# Altium PCB PCB1.PcbDoc
Units mm, origin at the board's own origin, x right, y up, seen from the top; angles counter-clockwise.
Board outline 28.83 x 22.61 mm, 2 copper layers (Top Layer, Bottom Layer); 35 components, 19 nets, 94 pads, 20 vias.
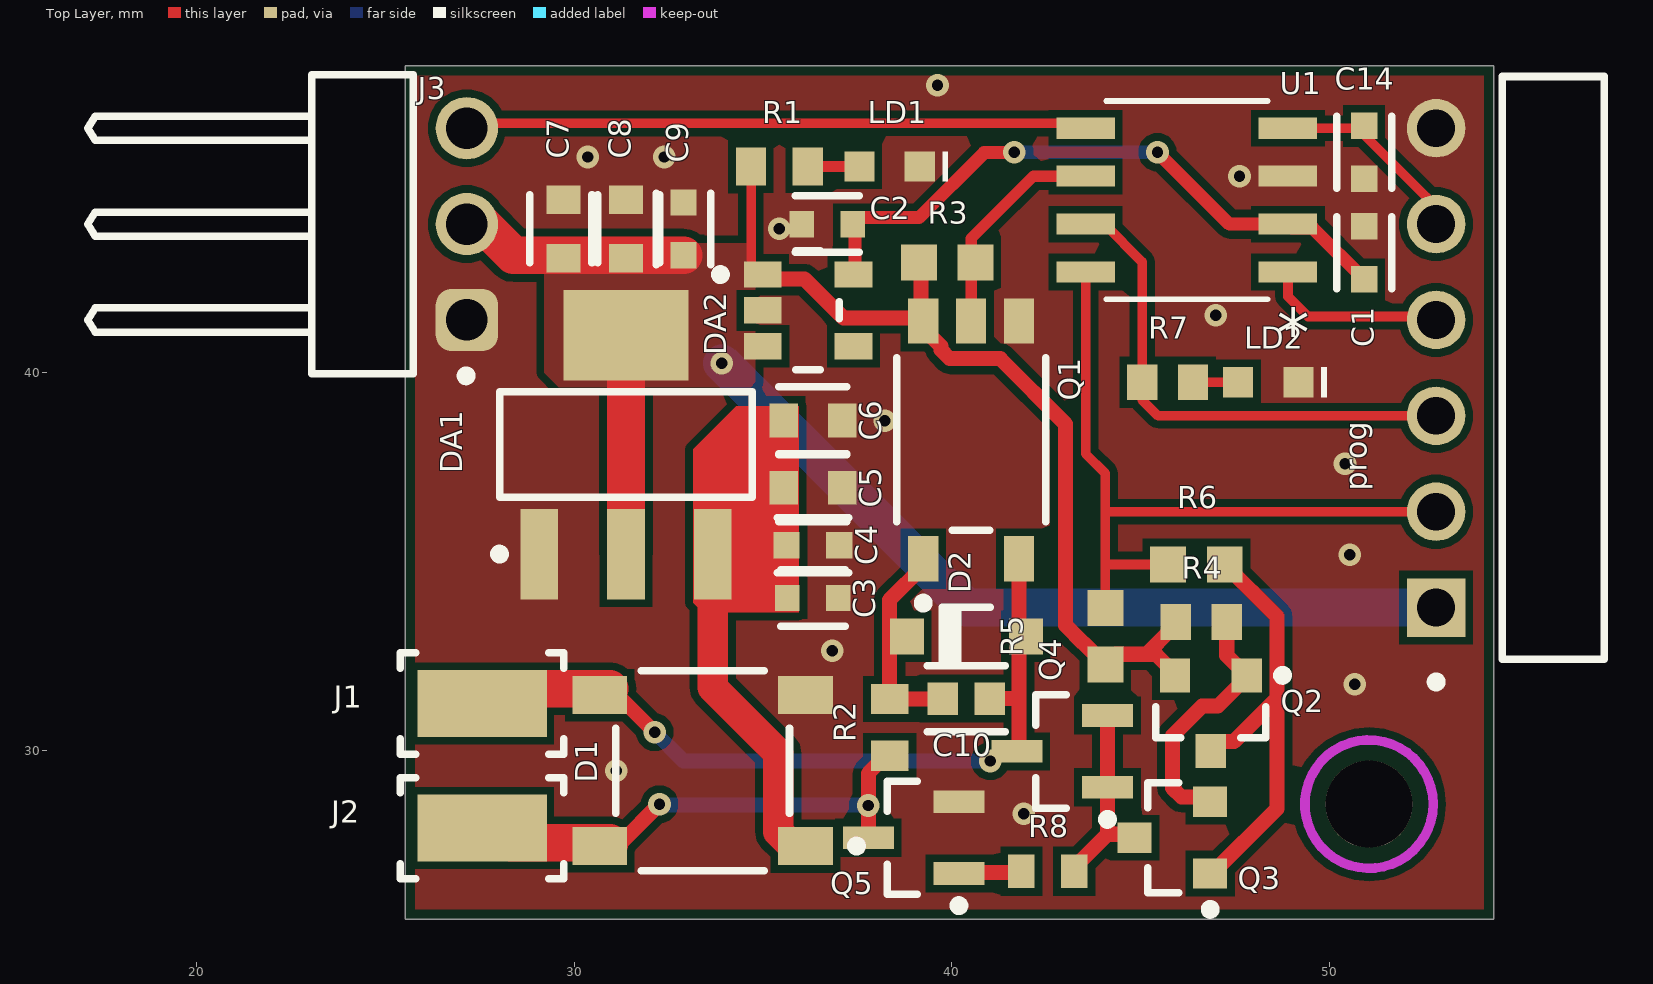
[diagram p0: Top Layer view]
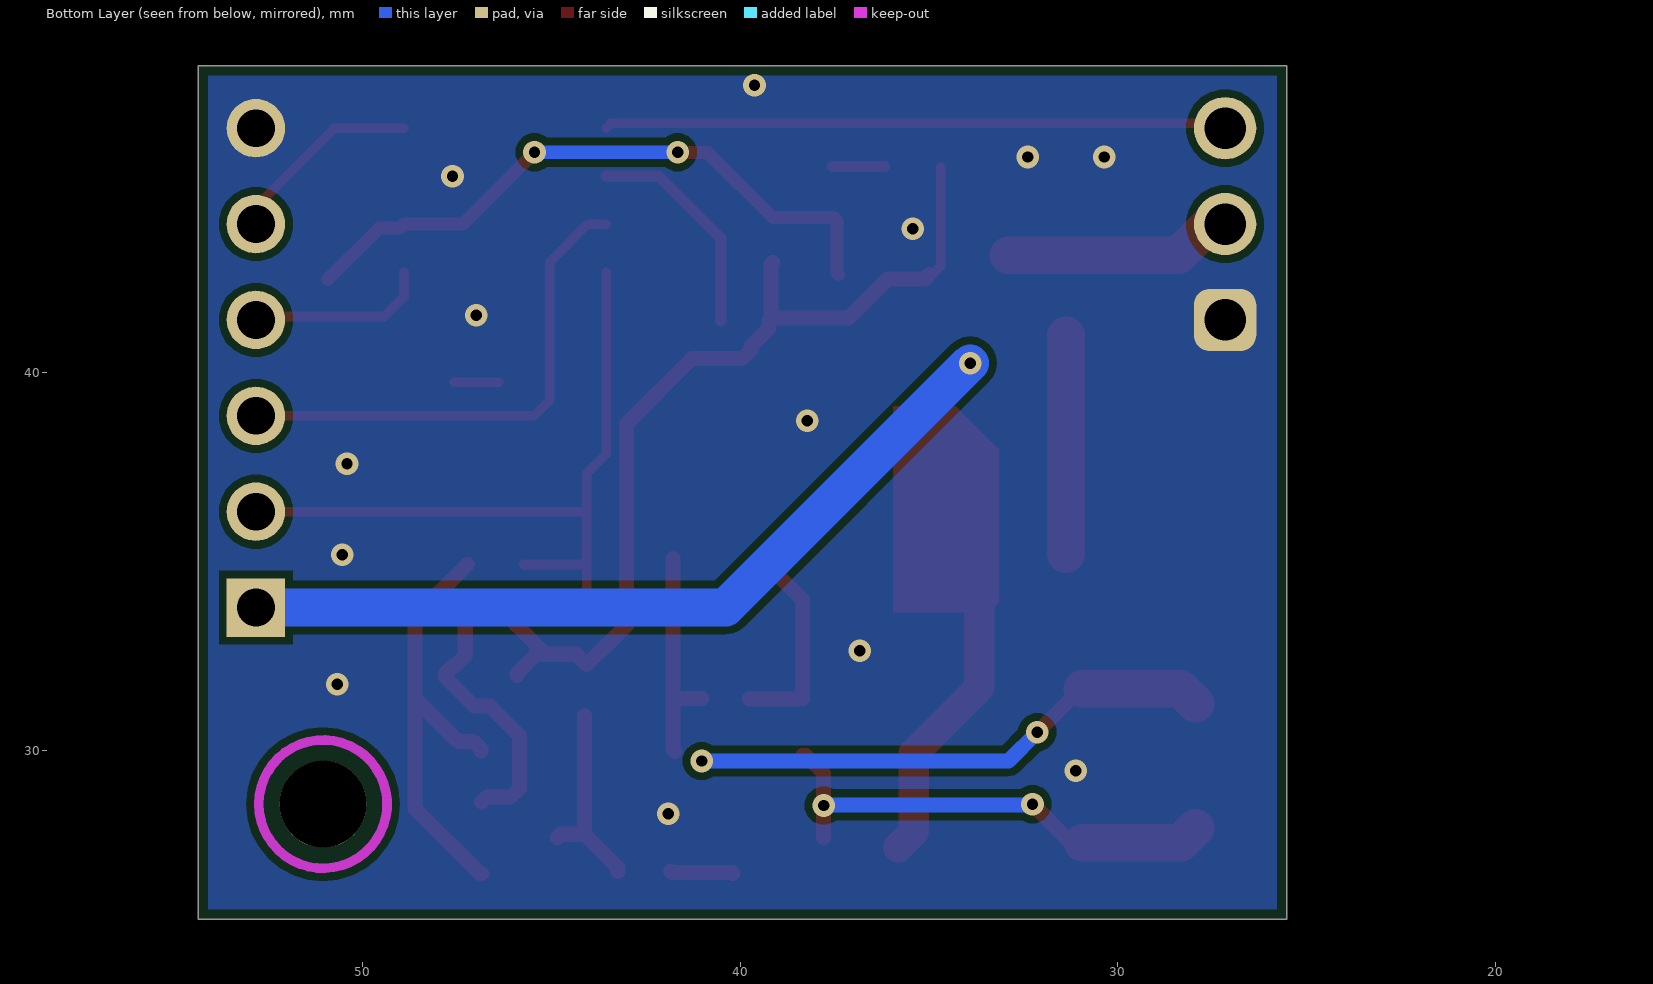
[diagram p1: Bottom Layer view, seen from below]
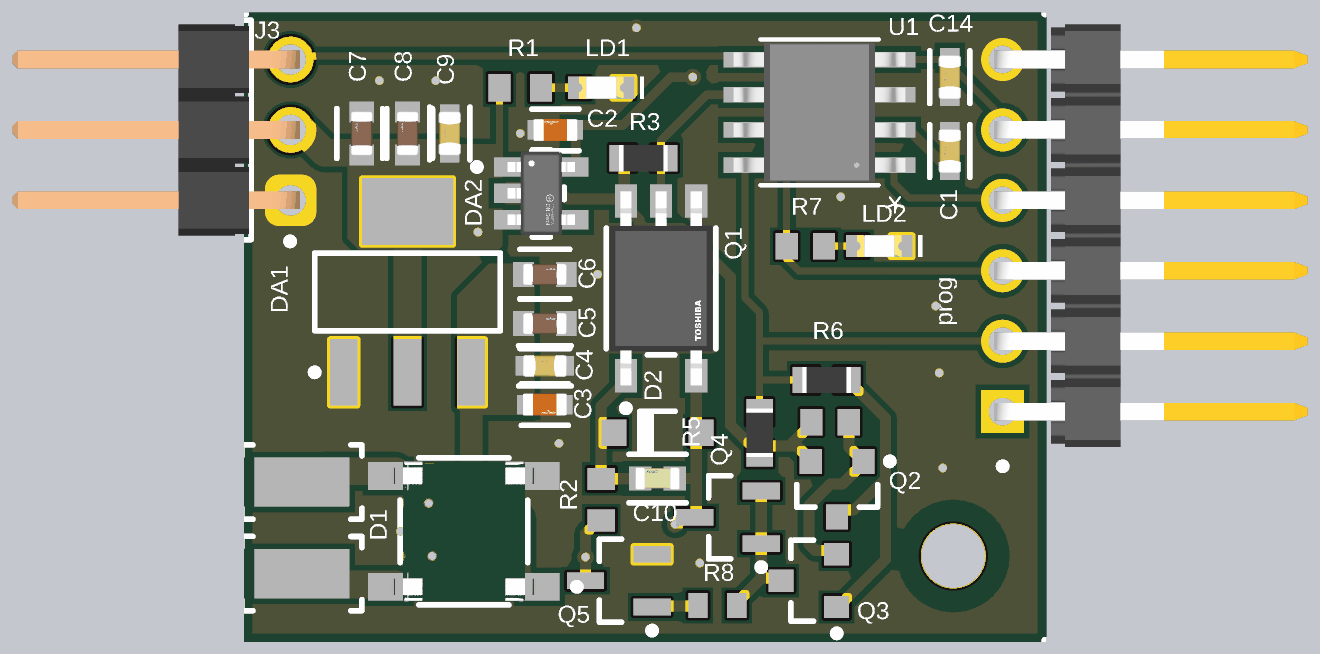
[diagram p2: 3D render of the assembled board from above, using the file's embedded part models]

## Layer stack, top to bottom
Top Solder: solder mask 0.0102, Solder Resist, Dk 3.5
Top Layer: signal copper 0.0356
Dielectric 1: dielectric 0.32, FR-4, Dk 4.8
Bottom Layer: signal copper 0.0356
Bottom Solder: solder mask 0.0102, Solder Resist, Dk 3.5

## Board outline
25.527,25.527 54.356,25.527 54.356,48.133 25.527,48.133

## Design rules (kind name [scope] priority, off if disabled: settings)
BoardOutlineClearance [All] p1: gap=0.254 ignorepadtopadclearanceinfootprint=FALSE except(0: Arc-SplitContinuation Track-SplitContinuation SMDPad-SplitContinuation THPad-SplitContinuation Via-SplitContinuation Fill-SplitContinuation Poly-SplitContinuation Region-SplitContinuation Text-SplitContinuation)
Clearance [All] p1: gap=0.2 ignorepadtopadclearanceinfootprint=FALSE
PolygonConnect [All] p1: connectstyle=Direct reliefconductorwidth=0.254 reliefentries=4 polygonreliefangle="90 Angle" airgapwidth=0.254
RoutingVias [All] p1: holewidth=0.3 width=0.7 viastyle="Through Hole" minholewidth=0.3 minwidth=0.5 maxholewidth=3 maxwidth=5
SolderMaskExpansion [All] p1: expansion=0.102 istentingtop=FALSE
SupplyNets "Schematic Supply Nets_3" [InNet('+12V')] p1: voltage=0.000
SupplyNets "Schematic Supply Nets_2" [InNet('+5V')] p2: voltage=0.000
SupplyNets "Schematic Supply Nets_1" [InNet('GND')] p3: voltage=0.000
SupplyNets "Schematic Supply Nets" [InNet('+3V3')] p4: voltage=0.000
Width [All] p1: maxlimit=1 minlimit=0.254 preferedwidth=0.3
30 further rules are at their usual default settings.

## Components (designator, comment, footprint, x,y, rotation, side; value= is the part's Value field where it differs from the comment)
C1 "CGA3E2X7R1H104K080AA" FP-CGA3E-0_3-0_1-MFG 50.927,43.18 r90 top
C2 "GRM188R60J106ME47D" FP-GRM188-0_1-e0_2_0_55-MFG 36.703,43.942 r180 top
C3 "GRM188R60J106ME47D" FP-GRM188-0_1-e0_2_0_55-MFG 36.322,34.036 r0 top
C4 "CGA3E2X7R1H104K080AA" FP-CGA3E-0_3-0_1-MFG 36.322,35.433 r0 top
C5 "GRM188R61A226ME15D" FP-GRM188-0_2-MFG 36.322,36.957 r0 top
C6 "GRM188R61A226ME15D" FP-GRM188-0_2-MFG 36.322,38.735 r0 top
C7 "GRM188R61A226ME15D" FP-GRM188-0_2-MFG 29.718,43.815 r90 top
C8 "GRM188R61A226ME15D" FP-GRM188-0_2-MFG 31.369,43.815 r90 top
C9 "CGA3E2X7R1H104K080AA" FP-CGA3E-0_3-0_1-MFG 32.893,43.815 r90 top
C10 "C0603C271J5GACTU" FP-C0603C-CF-IPC_C 40.386,31.369 r0 top value="270 pF"
C14 "CGA3E2X7R1H104K080AA" FP-CGA3E-0_3-0_1-MFG 50.927,45.847 r90 top
D1 "ABS10A-13" FP-SOPA-4-MFG 33.401,29.464 r180 top
D2 "1N4148W-7-F" DIOD-SOD123-2_V 40.386,33.02 r180 top
DA1 "LD1117S50CTR" SOT-223_N 31.369,38.1 r90 top
DA2 "NCP114ASN330T1G" FP-483-MFG 36.195,41.656 r0 top
J1 "5015" FP-5015-MFG 27.559,31.242 r0 top
J2 "5015" FP-5015-MFG 27.559,27.94 r0 top
J3 "61300311021" 61300311021 24.384,43.942 r270 top
LD1 "150060VS75000" WL-SMCW_0603_150060xx75000 38.354,45.466 r180 top
LD2 "150060VS75000" WL-SMCW_0603_150060xx75000 48.387,39.751 r180 top
prog "901210766" FP-901210766-MFG 55.832,40.132 r90 top
Q1 "TLP2362(TPR,E" FP-11-4L1S-MFG 40.513,38.227 r90 top
Q2 "BC857CLT1G" ONSC-SOT-23-3-318-08_V 46.863,30.988 r270 top
Q3 "BC857CLT1G" ONSC-SOT-23-3-318-08_V 45.847,27.686 r180 top
Q4 "BC847B" INF-SOT23_M 42.926,29.972 r180 top
Q5 "BC847B" INF-SOT23_M 38.989,27.686 r180 top
R1 "RC0603FR-071K5L" RESC1608X55X25ML10T15 35.433,45.466 r0 top value=1k5
R2 "RC0603FR-071K5L" RESC1608X55X25ML10T15 38.354,30.607 r90 top value=1k5
R3 "ERJ3EKF1002V" RESC1609X55X30NL15T15 39.878,42.926 r0 top value=10k
R4 "ERJ-3EKF1502V" RESC1608X55X30NL15T15 46.609,33.401 r180 top value=15
R5 "ERJ3EKF1002V" RESC1609X55X30NL15T15 44.069,33.02 r90 top value=10k
R6 "ERJ3EKF1002V" RESC1609X55X30NL15T15 46.482,34.925 r0 top value=10k
R7 "ERJ-3EKF1003V" RESC1608X55X30NL15T15 45.72,39.751 r0 top value=100
R8 "RC0603FR-076K8L" RESC1608X55X25NL10T15 42.545,26.797 r180 top value=6k8
U1 "STM32G031J6Mx" SO-8 46.228,44.577 r180 top value=Value

## Footprints (in the part's own frame and the unit in brackets; to place one, negate y for a bottom-side part, rotate by r counter-clockwise, add the part's x,y. Pads: shape width x height; smd on the part's side, far side on the other; paste and mask are expansions set on the pad)
61300311021 [mm] "Pin Header, pitch 2.54 mm, THT, Angled, single row, 3p"
  rrect50% 1.65x1.65 hole 1.1: 1(2.54,2.77)
  round 1.65 hole 1.1: 2(0,2.77) 3(-2.54,2.77)
  silkscreen extent -3.96,-7.27 4.14,2.88, body extent -3.81,-7.27 3.81,3.09, height 2.58
DIOD-SOD123-2_V [mm] "SOD123, 2-Leads, Body 2.7x1.55mm, Height 1.45mm"
  rect 0.9x0.95 smd: 1(-1.575,0) 2(1.575,0)
  silkscreen extent -0.64,-0.83 0.64,0.77, body extent -1.35,-0.77 1.35,0.77, height 1.45
FP-11-4L1S-MFG [mm]
  rect 1.2x0.8 smd paste+0 mask+0: 1(-3.15,1.27) 3(-3.15,-1.27) 4(3.15,-1.27) 5(3.15,0) 6(3.15,1.27)
  silkscreen extent -4.45,-1.97 2.17,1.97, body extent -3.85,-2.07 3.85,2.07, height 0.25
FP-483-MFG [mm]
  rect 1x0.7 smd paste+0 mask+0: 1(-1.2,0.95) 2(-1.2,0) 3(-1.2,-0.95) 4(1.2,-0.95) 5(1.2,0.95)
  silkscreen extent -2.45,-1.58 0.82,1.58, body extent -1.8,-1.83 1.8,1.83, height 0.25
FP-5015-MFG [mm]
  rect 3.43x1.78 smd paste+0 mask+0: 1(0,0)
  silkscreen extent -2.16,-1.34 2.17,1.34
FP-901210766-MFG [mm]
  rect 1.55x1.55 hole 1 paste-2539.97 mask+0: 1(-6.35,3)
  round 1.55 hole 1 paste-2539.97 mask+0: 2(-3.81,3) 3(-1.27,3) 4(1.27,3) 5(3.81,3) 6(6.35,3)
  silkscreen extent -8.44,-1.45 7.72,3.12, body extent -7.82,-8.5 7.82,3.88, height 0.25
FP-C0603C-CF-IPC_C [mm]
  rect 0.807x0.858 smd paste+0 mask+0: 1(-0.626,0) 2(0.626,0)
  silkscreen extent -1.03,-0.87 1.03,0.87, body extent -1.13,-0.58 1.13,0.58, height 0.25
FP-CGA3E-0_3-0_1-MFG [mm]
  rect 0.7x0.7 smd paste+0 mask+0: 1(-0.7,0) 2(0.7,0)
  silkscreen extent -0.95,-0.72 0.95,0.72, body extent -1.15,-0.65 1.15,0.65, height 0.25
FP-GRM188-0_1-e0_2_0_55-MFG [mm]
  rect 0.65x0.7 smd paste+0 mask+0: 1(-0.675,0) 2(0.675,0)
  silkscreen extent -0.85,-0.75 0.85,0.75, body extent -1.1,-0.55 1.1,0.55, height 0.25
FP-GRM188-0_2-MFG [mm]
  rect 0.75x0.9 smd paste+0 mask+0: 1(-0.775,0) 2(0.775,0)
  silkscreen extent -0.9,-0.9 0.9,0.9, body extent -1.25,-0.6 1.25,0.6, height 0.25
FP-SOPA-4-MFG [mm]
  rect 1.45x1 smd paste+0 mask+0: 1(-2.725,2) 2(2.725,2) 3(-2.725,-2) 4(2.725,-2)
  silkscreen extent -4.2,-2.65 2.3,2.65, body extent -3.55,-2.75 3.55,2.75, height 0.25
INF-SOT23_M [mm] "SOT23, 3-Leads, Body 2.9x1.3 mm, Pitch 0.95 mm, IPC Low Density"
  rect 1.35x0.6 smd: 1(-1.2,0.95) 2(-1.2,-0.95) 3(1.2,0)
  silkscreen extent -1.33,-1.5 0.7,1.92, body extent -0.7,-1.5 0.7,1.5, height 1.1
ONSC-SOT-23-3-318-08_V [mm] "SOT23, 3-Leads, Body 2.92x1.3mm, Pitch 0.95mm"
  rect 0.9x0.8 smd: 1(-1,0.95) 2(-1,-0.95) 3(1,0)
  silkscreen extent -1.12,-1.46 0.65,2.03, body extent -0.65,-1.46 0.65,1.46, height 1.11
RESC1608X55X25ML10T15 [mm] "Chip Resistor, 2-Leads, Body 1.60x0.80mm, IPC Low Density"
  rect 0.8x1 smd: 1(-0.75,0) 2(0.75,0)
  body extent -0.85,-0.45 0.85,0.45, height 0.55
RESC1608X55X25NL10T15 [mm] "Chip Resistor, 2-Leads, Body 1.70x0.90mm, IPC Medium Density"
  rect 0.7x0.9 smd: 1(-0.7,0) 2(0.7,0)
  body extent -0.85,-0.45 0.85,0.45, height 0.55
RESC1608X55X30NL15T15 [mm] "Chip Resistor, 2-Leads, Body 1.60x0.80mm, IPC Medium Density"
  rect 0.8x0.95 smd: 1(-0.675,0) 2(0.675,0)
  body extent -0.87,-0.48 0.87,0.48, height 0.55
RESC1609X55X30NL15T15 [mm] "Chip Resistor, 2-Leads, Body 1.75x0.95mm, IPC Medium Density"
  rect 0.95x0.95 smd: 1(-0.75,0) 2(0.75,0)
  body extent -0.87,-0.48 0.87,0.48, height 0.55
SO-8 [mil] "STM32 package, SO8N, 4.9 x 6mm"
  rect 61x22 smd paste+0 mask+0: 1(-105.5,75) 2(-105.5,25) 3(-105.5,-25) 4(-105.5,-75) 5(105.5,-75) 6(105.5,-25) 7(105.5,25) 8(105.5,75)
  silkscreen extent -84,-104 84,104, body extent -122,-98 122,99, height 69
SOT-223_N [mm] "SOT223, 4-Leads, Body 6.5x3.5mm, Pitch 2.3mm, Lead Span 7mm, IPC Medium Density"
  rect 2.4x1 smd: 1(-2.9,2.3) 2(-2.9,0) 3(-2.9,-2.3)
  rect 2.4x3.3 smd: 4(2.9,0)
  silkscreen extent -3.02,-3.35 1.4,3.47, body extent -1.85,-3.35 1.85,3.35, height 1.8
WL-SMCW_0603_150060xx75000 [mm] "SMD Mono-color Chip LED, body 1.60 x 0.80 mm"
  rect 0.8x0.8 smd: 1(-0.8,0) 2(0.8,0)
  silkscreen extent -1.55,-0.4 -1.4,0.4, body extent -0.8,-0.4 0.8,0.4, height 0.7

## Part data
C1 C4 C9 C14: library part CMP-2000-07546-2, "Cap Ceramic 100nF 50V X7R 10% Pad SMD 0603 +125°C Automotive T/R", Capacitance=100nF, Case Code (Imperial)=0603, Case Code (Metric)=1608, Dielectric=X7R, Max Operating Temperature=125°C, Min Operating Temperature=-55°C, Package Quantity=1, Ratings=AEC-Q200, Tolerance=10%, Voltage=50V, Case/Package=0603, Composition=Ceramic, Depth=0.8mm, Height=0.8mm, Lead Free="Lead Free", Length=1.6mm, Mount="Surface Mount", Packaging="Tape and Reel", Radiation Hardening=No, REACH SVHC="No SVHC", Termination=SMD/SMT, Thickness=0.035inch, Voltage Rating=50V, Voltage Rating (DC)=50V, Weight=7.1E-05oz, Width=0.8mm
C2 C3: library part CMP-2006-02792-2, "Chip Multilayer Ceramic Capacitors for General Purpose, 0603, 10uF, X5R, 15%, 20%, 6.3V", Capacitance=10uF, Case Code (Imperial)=0603, Case Code (Metric)=1608, Dielectric=X5R, Max Operating Temperature=85°C, Min Operating Temperature=-55°C, Package Quantity=4000, Tolerance=20%, Voltage=6.3V, Case/Package=0603, Depth=0.8mm, Height=0.8mm, Lead Free="Lead Free", Length=1.6mm, Material=Ceramic, Mount="Surface Mount", Packaging="Tape and Reel", Radiation Hardening=No, REACH SVHC="No SVHC", Termination=SMD/SMT, Thickness=0.035inch, Voltage Rating=6.3V, Voltage Rating (DC)=6.3V, Width=0.031inch
C5 C6 C7 C8: library part CMP-2000-06337-3, "Chip Multilayer Ceramic Capacitors for General Purpose, 0603, 22uF, X5R, 15%, 20%, 10V", Capacitance=22uF, Case Code (Imperial)=0603, Case Code (Metric)=1608, Dielectric=X5R, Max Operating Temperature=85°C, Min Operating Temperature=-55°C, Package Quantity=4000, Tolerance=20%, Voltage Rating=10V, Case/Package=0603, Depth=0.8mm, Height=0.8mm, Lead Free="Lead Free", Length=1.6mm, Material=Ceramic, Mount="Surface Mount", Packaging="Tape and Reel", REACH SVHC="No SVHC", Termination=SMD/SMT, Thickness=0.039inch, Voltage Rating (DC)=10V, Weight=0.000222oz, Width=0.8mm
C10: library part CMP-2006-03310-2, "CAP CER 270PF 50V C0G/NP0 0603", Capacitance="270 pF", Manufacturer=KEMET, Package=C0603C-CF, Temperature="-55°C to +125°C", Temperature Characteristic=C0G, Temperature Coefficient=30ppm/°C, Temperature Range High=+125°C, Temperature Range Low=-55°C, Tolerance=0.05, Voltage Rating="50 V", Automotive=Yes, Automotive Grade="Grade 1", Category=Cap, ComponentLink2Description=Datasheet, ComponentLink2URL=https://api.kemet.com/component-edge/download/datasheet/C0603C100J5GACAUTO.pdf, Device Class L1="Passive Components", Device Class L2=Capacitors, Device Class L3="Ceramic Capacitors", Digikey Description="CAP CER 270PF 50V C0G/NP0 0603", Height=0.87mm, Lead Free=Yes, Manufacturer Part Number=C0603C271J5GACTU, Material=Ceramic, Mouser Description="Multilayer Ceramic Capacitors MLCC - SMD/SMT 50volts 270pF C0G 5%", Octopart=https://octopart.com/c0603c271j5gactu-kemet-136709, RoHS=TRUE
D1: library part CMP-12791-000054-1, "BRIDGE RECT 1PHASE 1KV 1A 4SOPA", Average Rectified Current=1A, Case/Package=SMD/SMT, Max Operating Temperature=150°C, Min Operating Temperature=-55°C, Mount="Surface Mount", Packaging="Cut Tape"
D2: library part CMP-2000-04932-2, "Fast Switching Diode, 100 V, 0.15 A, -65 to 150 degC, 2-Pin?SOD123, RoHS, Tape and Reel", If - Forward Current=0.15A, Ir - Reverse Current=1uA, Manufacturer=DiodesIncorporated, Max Surge Current=2A, Maximum Operating Temperature=+150C, Minimum Operating Temperature=-65C, Operating Temperature Range=-65Cto+150C, Package / Case=SOD-123, Package Reference=SOD123-2, Peak Reverse Voltage=100V, Vf - Forward Voltage=1.25V, Brand=DiodesIncorporated, Configuration=Single, Datasheet URL=http://www.farnell.com/datasheets/1915529.pdf, Datasheet Version="Rev. 24-2, 10/2013", Factory Pack Quantity=3000, Height=1.25mm, Length=2.85mm, Manufacturer URL=http://www.diodes.com/, Mounting Style=SMD/SMT, Package URL=http://www.diodes.com/datasheets/ds18004.pdf, Packaging=Reel, Product=SwitchingDiodes, Product Category=Diodes-GeneralPurpose,Power,Switching, Recovery Time=4ns, RoHS=True, Series=1N4148, Type=SwitchingDiode, Unit Weight=0.000353oz, Width=1.7mm
DA1: library part CMP-0244-00311-1, "Fixed Low Drop Positive Voltage Regulator, 5V, 4-Pin SOT-223, Tape and Reel", ComponentLink1Description="Manufacturer URL", ComponentLink1URL=http://www.st.com, ComponentLink2Description=Datasheet, ComponentLink2URL=http://www.st.com/internet/com/TECHNICAL_RESOURCES/TECHNICAL_LITERATURE/DATASHEET/CD00000544.pdf, DatasheetVersion=1/11/2011, PackageDescription="4-Pin SOT-223 Package, 6.5 x 3.5 mm Body, 2.3 mm Pitch, 7 mm Lead Span", PackageReference=SOT-223, PackageVersion=2010
DA2: library part CMP-07128-000001-1, "IC REG LINEAR 3.3V 300MA 5TSOP", Dropout Voltage=150mV, Manufacturer="ON Semiconductor", Max Junction Temp=+150°C, Max Supply Voltage=5.5V, Min Supply Voltage=1.7V, Nominal Supply Current=50uA, Output Current=300mA, Output Voltage=3.3V, Package=483, Temperature="to +150°C", Accuracy Percentage=1%, Automotive=No, Category=IC, ComponentLink2Description=Datasheet, ComponentLink2URL=https://www.onsemi.com/pub/Collateral/NCP114-D.PDF, Device Class L1="Integrated Circuits (ICs)", Device Class L2="Power Management ICs", Device Class L3="Voltage Regulators - Linear", Digikey Description="IC REG LINEAR 3.3V 300MA 5TSOP", Footprint Url=https://www.onsemi.com/pub/Collateral/483.PDF, Height=1.1mm, Lead Free=Yes, Manufacturer Part Number=NCP114ASN330T1G, Number of Outputs=1, Octopart=https://octopart.com/ncp114asn330t1g-on+semiconductor-74628742, Output Type=Fixed, RoHS=TRUE, Standoff Height=0.01mm, Temperature Range High=+150°C
J1 J2: library part CMP-2000-05183-2, "PC TEST POINT MINIATURE", Manufacturer=keystone, Automotive=No, Category=Conn, ComponentLink2Description=Datasheet, ComponentLink2URL=http://www.keyelco.com/product-pdf.cfm?p=1353, Conn Orientation=Straight, Contact Material=Silver, Device Class L1=Connectors, Device Class L2=unset, Device Class L3=unset, Digikey Description="PC TEST POINT MINIATURE", Height=1.65mm, Lead Free=Yes, Manufacturer Part Number=5015, Number of Contacts=1, Octopart=https://octopart.com/5015-keystone-3822, Package=5015, RoHS=TRUE
J3: library part CMP-1502-01061-3, Color=Black, Contact Resistance=20mΩ, Current Rating=3A, Operating Supply Voltage=250V, Connector Type="Male Pin", Contact Material=Copper, Contact Mating Length=5.9944mm, Contact Plating=Gold, Gender=Male, Lead Pitch=2.54mm, Mount="Through Hole", NexarPartId=32855520, Number of Contacts=3, Number of Pins=3, Number of Positions=3, Number of Rows=1, Packaging=Bulk, Pitch=2.54mm, REACH SVHC=Unknown, RoHS=Compliant, Termination=Solder
LD1 LD2: library part CMP-1426-00006-7, "WURTH ELEKTRONIK - 150060VS75000 - LED, Green, SMD, 0603, 30 mA, 2 V, 570 nm", Case Code (Imperial)=0603, Case Code (Metric)=1608, Color=Green, Forward Current=100mA, Forward Voltage=2V, Max Junction Temperature (Tj)=95°C, Max Operating Temperature=85°C, Max Reverse Voltage (DC)=5V, Min Operating Temperature=-40°C, Power Dissipation=72mW, Test Current=20mA, Case/Package=0603, Dominant Wavelength=570nm, Height=700µm, Length=1.6mm, Lens Style="Clear, Rectangular", Luminous Intensity=40mcd, Mount="Surface Mount", Number of Pins=2, Packaging="Tape and Reel", Peak Wavelength=572nm, REACH SVHC=Unknown, Reverse Voltage=5V, RoHS=Compliant, Viewing Angle=140°, Wavelength=570nm, Width=800µm
prog: library part CMP-04776-000096-1, "CONN HEADER R/A 6POS 2.54MM", Current Rating=3A, Manufacturer=Molex, Package=0, Temperature="-55°C to +125°C", Temperature Range High=+125°C, Temperature Range Low=-55°C, Voltage Rating=350V, Automotive=No, Category=Conn, ComponentLink2Description=Datasheet, ComponentLink2URL=https://www.molex.com/webdocs/datasheets/pdf/en-us/0901210766_PCB_HEADERS.pdf, Conn Gender=Male, Conn Orientation="Right Angle", Contact Material=Gold,Nickel, Device Class L1=Connectors, Device Class L2="Headers and Wire Housings", Device Class L3=unset, Digikey Description="CONN HEADER R/A 6POS 2.54MM", Footprint Url=https://www.molex.com/pdm_docs/sd/901210766_sd.pdf, Height=3.6mm, Lead Free=Yes, Manufacturer Part Number=901210766, Number of Contacts=6, Number of Rows=1, Octopart=https://octopart.com/90121-0766-molex-655456, Pitch=2.54mm, RoHS=TRUE
Q1: library part CMP-35887-000013-1, "OPTOISO 3.75KV OPEN COLL SO6-5", Forward Voltage=1.55V, Max Operating Temperature=125°C, Min Operating Temperature=-40°C, Output Current per Channel=25mA, Package Quantity=3000, Input Type=DC, Mount="Surface Mount", Number Of Channels=1, Packaging="Tape and Reel", Propagation Delay=100ns, Series=-
Q2 Q3: library part CMP-1048-00802-1, "General Purpose Transistor, PNP Silicon, 3-Pin SOT-23, Pb-Free, Tape and Reel", Manufacturer="On Semiconductor", ComponentLink1Description="Manufacturer URL", ComponentLink1URL=http://www.onsemi.com/, ComponentLink2Description=Datasheet, ComponentLink2URL=http://www.onsemi.cn/pub_link/Collateral/BC856ALT1-D.PDF, ComponentLink3Description="Package Specification", ComponentLink3URL=http://www.onsemi.cn/pub_link/Collateral/318-08.PDF, DatasheetVersion="Rev. 13", fT Min (MHz)=100, IC Continuous (A)=-0.1, Mounting Technology="Surface Mount", PackageDescription="3-Pin Small Outline Transistor, Body 2.92 x 1.3 mm, Pitch 0.95 mm", PackageReference=SOT-23-3-318-08, PackageVersion="Rev. AP, 11/2009", Packing="Tape and Reel", PartNumber=BC857CLT1G, Polarity=PNP, RoHS=TRUE
Q4 Q5: library part CMP-1177-00042-1, "NPN Silicon AF Transistor, 45 V VCEO, 100 mA IC, SOT23, Reel, Green", Manufacturer=Infineon, ComponentLink1Description="Manufacturer URL", ComponentLink1URL=http://www.infineon.com/, ComponentLink2Description=Datasheet, ComponentLink2URL=http://www.infineon.com/dgdl/bc847series_bc848series_bc849series_bc850series.pdf?folderId=db3a304314dca389011541d30fa21656&fileId=db3a304314dca389011541d4630a1657, ComponentLink3Description="Package Specification", ComponentLink3URL=http://www.infineon.com/dgdl/SOT23-Package_Overview.pdf?folderId=db3a30431936bc4b0119532290053c66&fileId=db3a30431936bc4b0119533468123c85, fT (typ)="250Â MHz", Green=TRUE, IBM (max)="200Â mA", IC (max)="100Â mA", ICBO (max)="15Â nA", ICM (max)="200Â mA", Mounting Technology="Surface Mount", PackageDescription="3-Pin Small Outline Transistor Package, 1.3 x 2.9 mm Body, 0.95 mm Pitch", PackageReference=SOT23, PackageVersion=Apr-08, Packing=Reel, PartNumber=BC847B, Polarity=NPN, Ptot (max)="330Â mW", VCBO (max)="50Â V", VCEO (max)="45Â V", VEBO (max)="6Â V"
R1 R2: library part CMP-2100-03665-1, "Chip Resistor, 1.5 KOhm, +/- 1%, 0.1 W, -55 to 155 degC, 0603 (1608 Metric), RoHS, Tape and Reel", Case Code (Imperial)=0603, Case Code (Metric)=1608, Manufacturer=Yageo, Max Operating Temperature=155degC, Max Power Dissipation=100mW, Min Operating Temperature=-55degC, Package Description="2-Pin Surface Mount Device, Body 1.6 x 0.8 mm", Package Quantity=1, Resistance=1.5KOhm, Temperature Coefficient=100ppm/degreesC, Tolerance=1%, Voltage Rating=50V, Case/Package=0603, Composition=ThickFilm, Datasheet URL=http://www.yageo.com/NewPortal/yageodocoutput?fileName=/pdf/R-Chip/PYu-RC_Group_51_RoHS_L_5.pdf, Datasheet Version="Rev. 5, 10/2016", Depth=0.8mm, Height=0.022inch, Lead Free=LeadFree, Length=0.063inch, Manufacturer URL=http://www.yageo.com/, Military Standard=Not, Number of Pins=2, Number of Terminations=2, Package Reference=0603, Packaging=TapeandReel, Power Rating=100mW, REACH SVHC=NoSVHC, RoHSCompliant=true, Termination=SMD/SMT, Voltage Rating (DC)=50V, Width=0.031inch
R3 R5 R6: library part CMP-1012-00623-3, "Chip Resistor, 10 KOhm, +/- 1%, 0.1 W, -55 to 155 degC, 0603 (1608 Metric), RoHS, Tape and Reel", Case Code (Imperial)=0603, Case Code (Metric)=1608, Manufacturer=Panasonic, Max Operating Temperature=155degC, Max Power Dissipation=100mW, Min Operating Temperature=-55degC, Package Description="2-Pin Surface Mount Device, Body 1.6 x 0.85 mm", Package Quantity=1, Package Reference=603, Resistance=10KOhm, Temperature Coefficient=100ppm\/degreesC, Tolerance=1%, Voltage Rating=75V, Case\/Package=0603, Composition=ThickFilm, Contact Plating=Tin, Datasheet URL=https://industrial.panasonic.com/cdbs/www-data/pdf/RDA0000/AOA0000C304.pdf, Datasheet Version=02/2017, Depth=0.8mm, Height=0.45mm, Lead Free=LeadFree, Length=1.6mm, Manufacturer URL=http://www.panasonic.com/, Military Standard=Not, Mount=SurfaceMount, Mounting Technology=SurfaceMount, Number of Pins=2, Number of Terminations=2, Packaging=TapeandReel, Power Rating=100mW, Radiation Hardening=No, REACH SVHC=NoSVHC, RoHSCompliant=true, Termination=SMD/SMT, Voltage Rating (DC)=75V, Width=0.031inch
R4: library part CMP-2000-00258-1, Manufacturer=Panasonic, Part Number=ERJ-3EKF1502V
R7: library part CMP-2000-00182-1, Manufacturer=Panasonic, Part Number=ERJ-3EKF1003V
R8: library part CMP-1659-00046-1, "Chip Resistor, 6.8 KOhm, +/- 1%, 100 mW, -55 to 155 degC, 0603 (1608 Metric), RoHS, Tape and Reel", Case\Package=Metal, Colour=Black, Current Rating="2 A", Max Operating Temperature="85 degC", Min Operating Temperature="-25 degC", Package Quantity=1, Voltage Rating="34 V", ComponentLink1Description="Manufacturer URL", ComponentLink1URL=http://www.yageo.com/, ComponentLink2Description=Datasheet, ComponentLink2URL=http://www.yageo.com/documents/recent/PYu-RC_Group_51_RoHS_L_04.pdf, Contact Material=Copper, Contact Plating=Silver, DatasheetVersion="Rev. 4, 02/2016", Gender=Female, Height="13 mm", Length="19.5 mm", Mount="Through Hole", PackageDescription="2-Pin Surface Mount Device, Body 1.6 x 0.8 mm", PackageReference=0603, Pins=1, REACH SVHC=Unknown, RoHSCompliant=true, Shielding=Unshielded, Width="10 mm"
U1: "The STM32G031x4/x6/x8 mainstream microcontrollers are based on high-performance Arm® Cortex®-M0+ 32-bit RISC core operating at up to 64 MHz frequency.   / 32 Kbytes of Flash program memory and 8 Kbytes of SRAM. With 28pin UFQFPN 4x4x0.55 package", Manufacturer_Part_Number=stm32g0_so8_t1, Copyright="Copyright (C) 2018 Accelerated Designs. All rights reserved", RefDes=RefDes, Type=DEV, Vendor=STMicroelectronics

## Free pads (board coordinates)
  round 2.3 hole 2.3: 1(51.054,28.575)

## Via types
v1: diameter 0.6, hole 0.3, Top Layer to Bottom Layer, tented both sides, 20 vias

## Nets (pads, with @x,y where several pads share a name; then routed paths per layer and width w, separated by ;. In a path a pad name is that pad's centre, name@x,y a point inside that pad or via, vN(x,y) a via of type N, cw(c..) or ccw(c..) an arc to the next point about the centre after c; other vN are vias at no path point)
+3V3: C1.1 C2.1 DA2.5 U1.2 | length 17.1
  Top Layer w0.35: DA2.5 37.434,42.645 37.434,44.023 37.528,44.117 39.135,44.117 40.856,45.838 41.647,45.838 v1(41.656,45.847) ; v1(45.45,45.847) 47.355,43.942 U1.2 49.012,43.838 49.569,43.838 C1.1
  Bottom Layer w0.35: v1(41.656,45.847) v1(45.45,45.847)
+5V: C7.1 C8.1 C9.1 DA1.2 DA1.4 DA2.1 DA2.3 J3.2 prog.1 Q1.6 Q2.2 R1.1 R3.1 R4.2 R5.1 | length 57.9
  Top Layer w0.254: R1.1 34.683,42.829 34.906,42.606 DA2.1
  Top Layer w0.4: DA2.1 35.111,42.49 36.095,42.49 37.129,41.456 39.164,41.456 Q1.6@39.185,41.434 ; R3.1 39.185,42.868 Q1.6@39.185,41.434 ; Q2.2 45.913,32.038 45.406,32.545 45.153,32.545 ; R4.2 45.934,33.326 45.446,32.838 45.153,32.545 ; Q1.6@39.185,41.434 Q1.6 39.243,41.177 39.713,40.707 39.713,40.611 39.947,40.377 41.284,40.377 43.011,38.65 43.011,33.312 43.477,32.846 43.493,32.846 R5.1 44.344,32.545 45.153,32.545
  Top Layer w1: J3.2@27.432,44.069 28.386,43.115 31.369,43.115 C9.1 ; DA1.2 DA1.4
  Bottom Layer w1: v1(33.909,40.259) 40.386,33.782 prog.1
+12V: C3.1 C4.1 C5.1 C6.1 D1.1 DA1.3 | length 8.7
  Top Layer w0.8: DA1.3 33.669,31.662 35.401,29.93 35.401,27.845 D1.1@35.814,27.432
Cnf_RX: prog.4 U1.1 | length 4.8
  Top Layer w0.254: U1.1 48.908,42.024 49.438,41.494 52.74,41.494 prog.4
DCC1: D1.2 J2.1 Q5.3 R2.1 | length 12.9
  Top Layer w0.4: D1.2@30.942,27.55 31.233,27.55 v1(32.258,28.575) ; Q5.3 v1(37.789,28.539) 37.789,29.392 38.254,29.857 R2.1
  Top Layer w1: J2.1@27.94,27.94 28.33,27.55 D1.2@30.942,27.55
  Bottom Layer w0.4: v1(32.258,28.575) 32.276,28.557 37.771,28.557 v1(37.789,28.539)
DCC2: C10.2 D1.4 D2.1 J1.1 Q1.3 Q4.3 | length 19.9
  Top Layer w0.4: D1.4@30.942,31.632 30.979,31.632 v1(32.131,30.48) ; C10.2 41.783,31.369 ; Q4.3 41.783,30.029 41.783,31.369 ; Q1.3 41.783,31.369
  Top Layer w1: J1.1@27.94,31.242 28.33,31.632 D1.4@30.942,31.632
  Bottom Layer w0.4: v1(32.131,30.48) 32.893,29.718 v1(41.021,29.718)
DCC_data: Q1.5 R3.2 U1.6 | length 5.9
  Top Layer w0.3: Q1.5 40.513,43.561 42.164,45.212 U1.6
GND: C1.2 C2.2 C3.2 C4.2 C5.2 C6.2 C7.2 C8.2 C9.2 C14.1 D1.3 DA1.1 DA2.2 J3.1 LD1.1 LD2.1 prog.6 Q1.4 Q5.2 U1.3
  other v1: 41.91,28.321 31.115,29.464 50.673,31.75 36.83,32.639 50.546,35.179 50.419,37.592 38.227,38.735 46.99,41.529 35.433,43.815 47.625,45.212 30.353,45.72 32.385,45.72 39.624,47.625
NetC10_1: C10.1 D2.2 Q1.1 R2.2 | length 5.5
  Top Layer w0.4: Q1.1 39.243,34.877 38.354,33.988 R2.2 38.36,31.363 39.754,31.363 C10.1
NetLD1_2: LD1.2 R1.2 | length 1.4
  Top Layer w0.3: R1.2 LD1.2
NetLD2_2: LD2.2 R7.2 | length 1.2
  Top Layer w0.254: R7.2 LD2.2
NetQ2_1: Q2.1 Q3.2 R4.1 | length 6.9
  Top Layer w0.4: Q3.2 46.714,28.769 46.081,28.769 45.847,29.003 45.847,30.388 46.63,31.171 47.046,31.171 47.813,31.938 Q2.1 47.813,32.038 47.613,32.238 47.563,32.238 47.284,32.517 R4.1
NetQ2_3: Q2.3 Q3.1 R6.2 | length 11.9
  Top Layer w0.4: Q3.1 46.897,26.736 48.613,28.452 48.613,31.372 ; Q2.3 46.863,30.038 47.063,30.238 47.479,30.238 48.613,31.372 ; R6.2 48.613,33.544 48.613,31.372
NetQ3_3: Q3.3 Q4.1 Q4.2 R8.1 | length 5.2
  Top Layer w0.4: R8.1 43.245,26.897 44.126,27.778 ; Q4.2 Q4.1 44.126,27.778 ; Q3.3 44.755,27.778 44.126,27.778
NetQ5_1: Q5.1 R8.2 | length 1.7
  Top Layer w0.4: Q5.1 40.22,26.766 41.815,26.766 R8.2
NRST: C14.2 prog.5 U1.4 | length 5.2
  Top Layer w0.254: U1.4 50.754,46.482 52.584,44.652 52.584,44.19 prog.5
S1: J3.3 U1.5 | length 16.2
  Top Layer w0.254: J3.3@27.432,46.609 43.421,46.609 U1.5
SWD_CLK/Cnf_TX: prog.2 R5.2 R6.1 U1.8 | length 19.5
  Top Layer w0.254: U1.8 43.548,37.859 44.069,37.338 44.069,36.322 ; R5.2 44.069,34.925 ; R6.1 44.069,34.925 ; prog.2 44.069,36.322 ; 44.069,34.925 44.069,36.322
SWD_IO/LED: prog.3 R7.1 U1.7 | length 13.5
  Top Layer w0.254: U1.7 44.044,43.942 45.045,42.941 45.045,40.767 45.045,39.283 45.466,38.862 prog.3
pads on no net: DA2.4

## Polygon pours and split planes (outlines as drawn)
GND on Bottom Layer "GND_Bot" (solid, remove dead copper, pour order 6): 25.527,48.133 54.356,48.133 54.356,25.527 25.527,25.527
+5V on Top Layer "+5V" (solid, remove dead copper, pour order 4): 29.21,43.434 29.21,40.005 29.591,39.624 34.671,39.624 34.798,39.751 34.798,43.307 34.671,43.434
GND on Top Layer "GND_Top" (solid, remove dead copper, pour order 7): 25.527,48.133 54.356,48.133 54.356,25.527 25.527,25.527

## Keep-outs
Keep-Out Layer:
  circle w0.254: c51.054,28.575 r1.7

## Other copper
Top Layer:
  region net +12V: 35.941,39.116 34.29,39.116 33.147,37.973 33.147,33.909 33.401,33.655 35.941,33.655

## Silkscreen, mask and mechanical layers (free items; w line width, h text height)
Board Shape:
  the board outline again, w0.1

## Dimensions
54.356,48.133 to 54.356,25.527 on Top Overlay
25.527,48.133 to 54.356,48.133 on Top Overlay
54.356,25.527 to 54.356,48.133 on Top Component Center
25.527,25.527 to 54.356,25.527 on Top Component Center

## Text inside footprints (layer, text, board x,y; h text height)
U1: Top 3D Body "*" at 48.171,43.421 h1.27 r180; Top Overlay "*" at 49.479,42.24 h1.27 r180; Mechanical 7 "Default Padstyle: RX61Y22D0T" at 55.118,52.159 h1.27 r180; Mechanical 7 "Pin One Padstyle: RX61Y22D0T" at 55.118,53.683 h1.27 r180; Mechanical 7 "Alt 1 Padstyle: OX60Y90D30P" at 54.8,58.255 h1.27 r180; Mechanical 7 "Alt 2 Padstyle: OX90Y60D30P" at 54.8,59.779 h1.27 r180; Mechanical 7 "0.158in/4.013mm" at 48.609,39.662 h0.64 r180; Mechanical 7 "0.244in/6.198mm" at 48.609,37.757 h0.64 r180; Mechanical 7 "0.197in/5.004mm" at 41.173,44.895 h0.64 r180; Mechanical 7 "0.05in/1.27mm" at 56.083,43.624 h0.64 r180; Mechanical 7 "0.033in/0.838mm" at 51.289,50.127 h0.64 r180